# Altium PCB Kanaloa_v2.0.0_Motor.PcbDoc (part 2 of 3)
Units mil, origin at the board's own origin, x right, y up, seen from the top; angles counter-clockwise.
Board outline 5000 x 6000 mil, 4 copper layers (Top Layer, +24V, GND, Bottom Layer), stack 62 mil thick; 213 components, 187 nets, 1008 pads, 744 vias.
Unrouted connection lines stored in the file: 2.
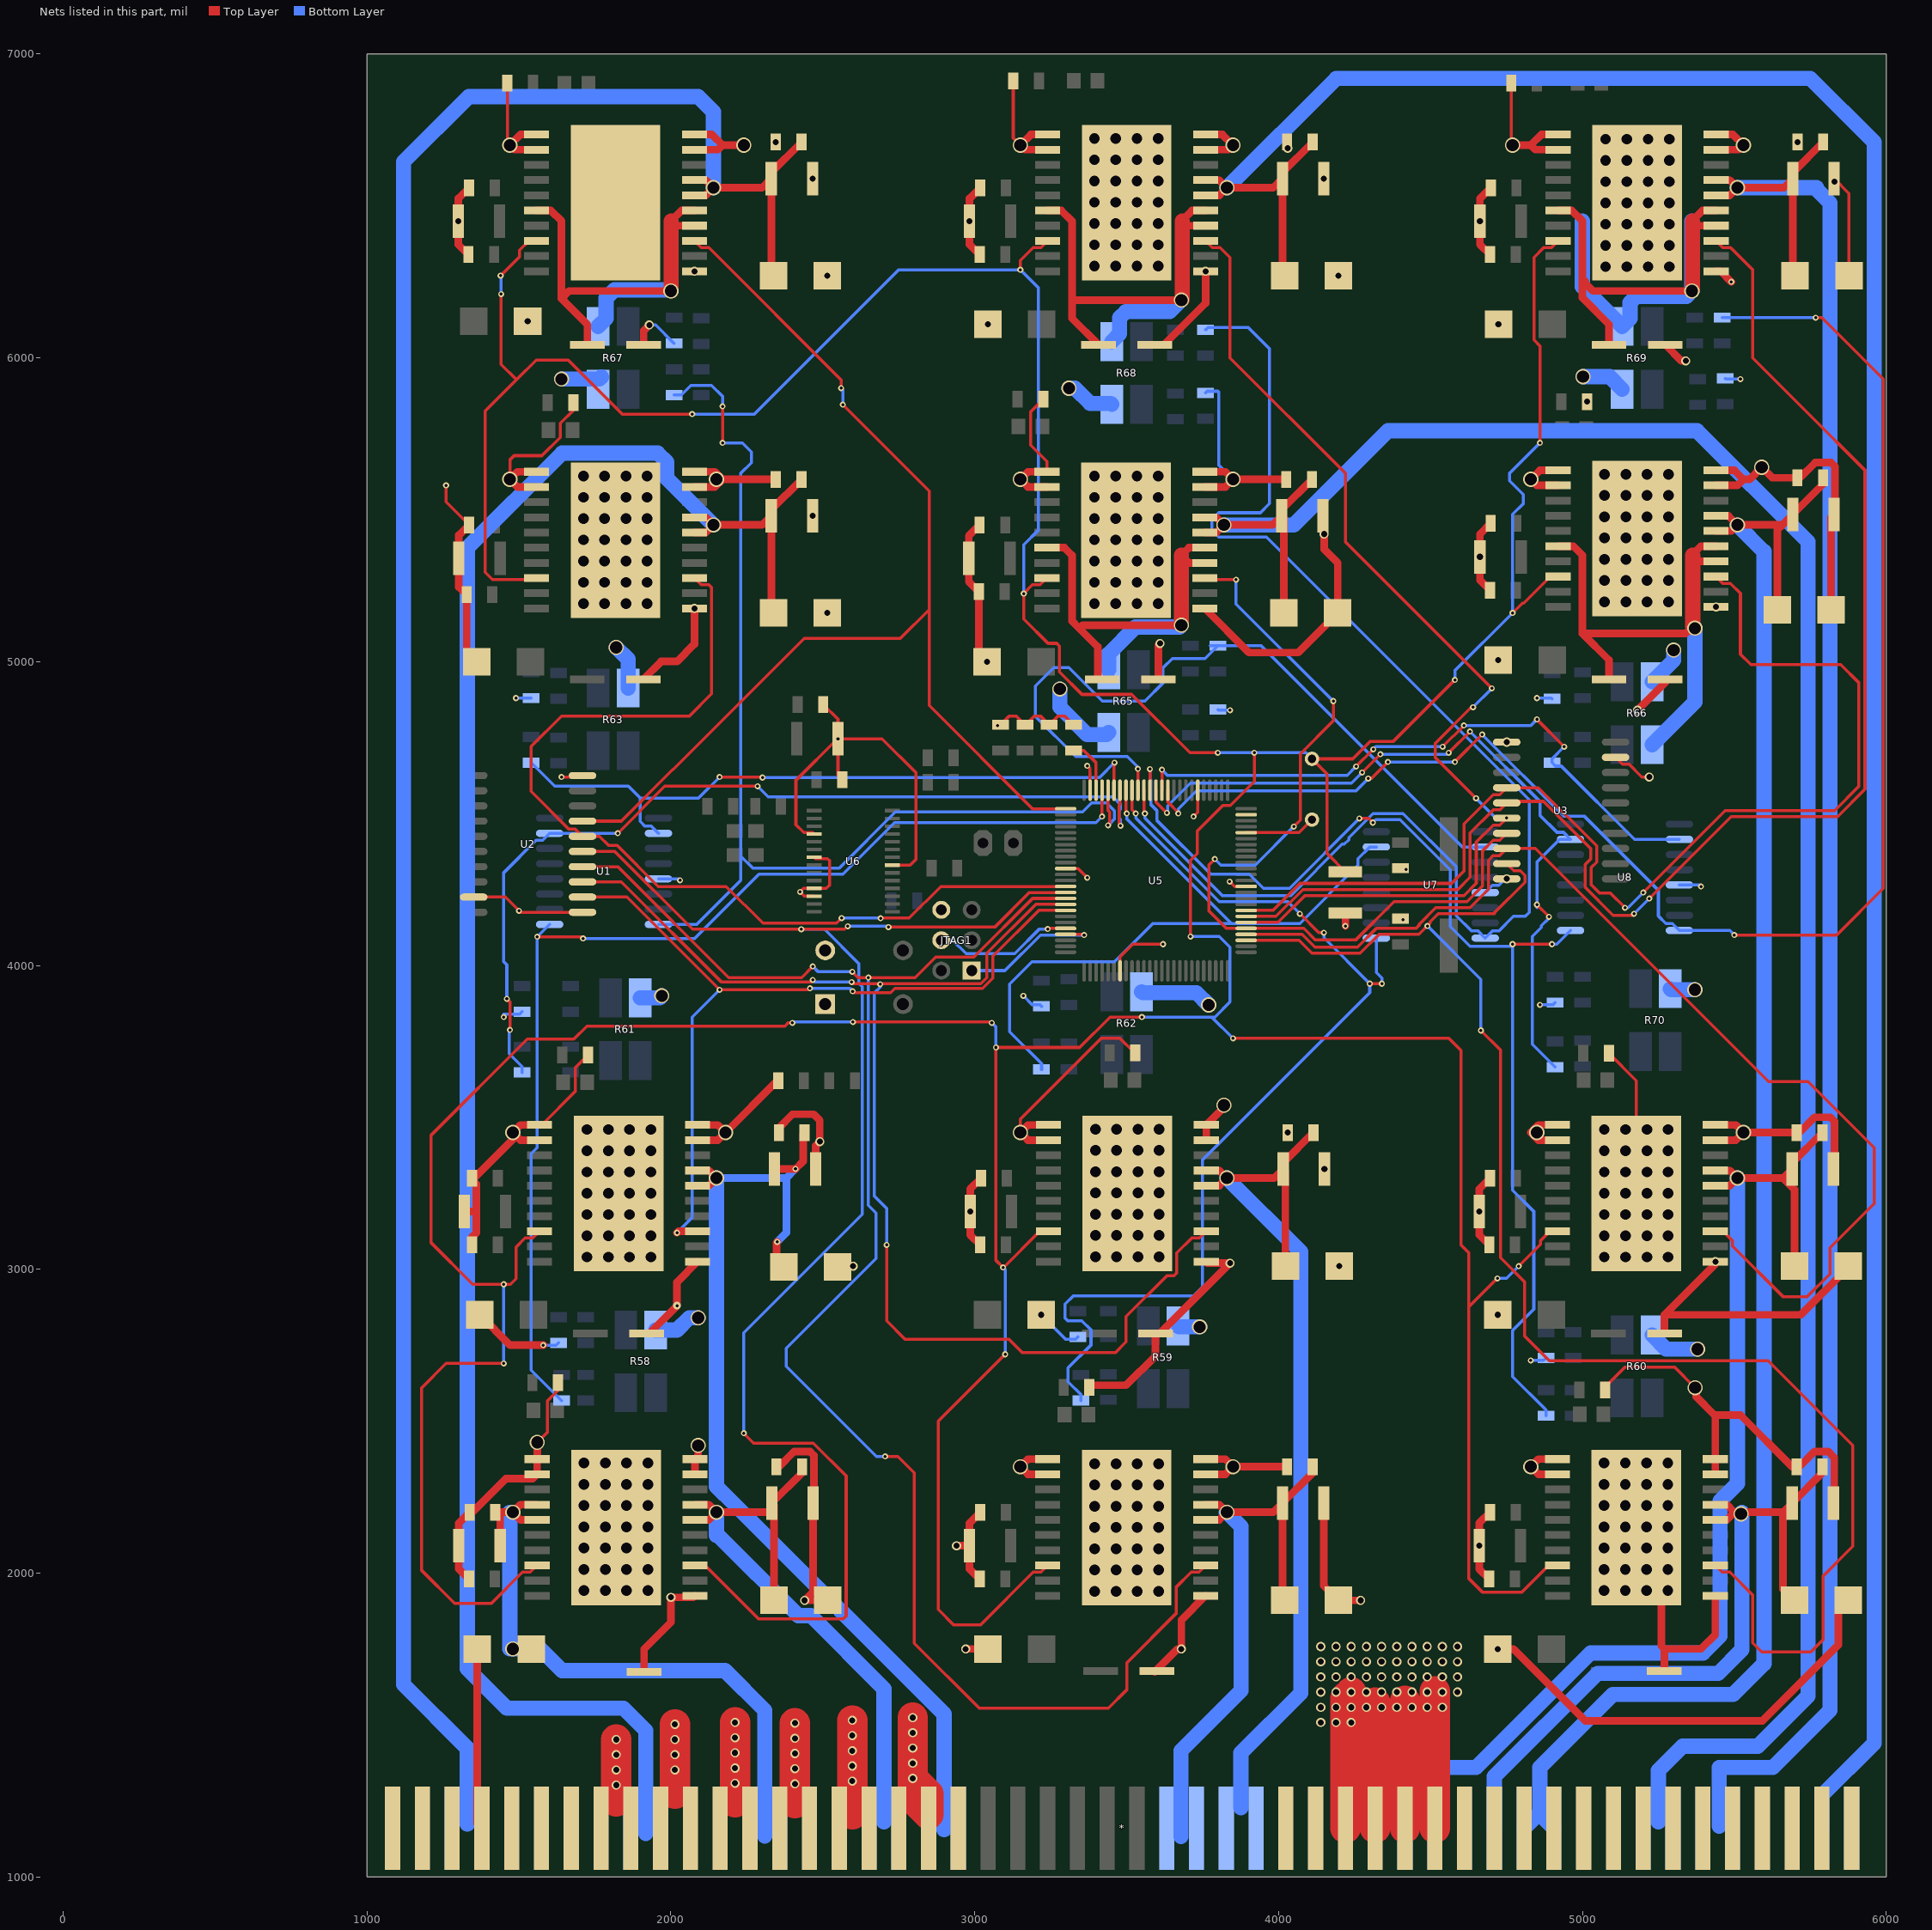
[diagram p4: the nets of this part, all layers, seen from the top]

## Via types
v1: diameter 50, hole 35, Top Layer to Bottom Layer, 336 vias
v2: diameter 20, hole 10, Top Layer to Bottom Layer, 183 vias
v3: diameter 30, hole 20, Top Layer to Bottom Layer, 137 vias
v4: diameter 50, hole 40, Top Layer to Bottom Layer, 87 vias
v5: diameter 25, hole 10, Top Layer to Bottom Layer, 1 vias

## Nets (pads, with @x,y where several pads share a name; then routed paths per layer and width w, separated by ;. In a path a pad name is that pad's centre, name@x,y a point inside that pad or via, vN(x,y) a via of type N, cw(c..) or ccw(c..) an arc to the next point about the centre after c; other vN are vias at no path point) (continued)
+24V_7: "C10_Motor 7.P" pad.4@3757.32,5325 pad.5@3757.32,5375 pad.16@3237.64,5375 R65.3 | length 1620.7
  Top Layer w25: pad.16@3237.64,5375 3295,5375 3320,5350 3320,5134 3344.52,5109.48 ; 3404.96,4942 3405,4942.04 3405,5049 3344.52,5109.48 ; v4(3680,5120) 3355.04,5120 3344.52,5109.48 ; pad.4@3757.32,5325 3705,5325 3680.12,5349.88 3680,5350 3705,5375 pad.5@3757.32,5375
  Top Layer w50: v4(3680,5120) 3680.12,5120.12 3680.12,5349.88 3680.12,5350
  Bottom Layer w25: 3610,5113.78 3616.22,5120
  Bottom Layer w50: R65.3@3440.79,4973.35 3440.79,5025.8 3528.77,5113.78 3610,5113.78 3673.78,5113.78 v4(3680,5120)
+24V_8: "C10_Motor 8.P" pad.4@5439.69,5330 pad.5@5439.69,5380 pad.16@4920,5380 R66.3 | length 1774.9
  Top Layer w25: pad.16@4920,5380 4970,5380 5000,5350 5000,5092.32 ; 5087.32,4942 5087.32,5005 5000,5092.32 ; v4@5363.35,5116.65 5339.02,5092.32 5000,5092.32 ; pad.4@5439.69,5330 5380,5330 5363.35,5346.65 5360,5350 5390,5380 pad.5@5439.69,5380
  Top Layer w50: 5362.48,5350 5363.35,5349.13 5363.35,5346.65 5363.35,5116.65 v4(5370,5110)
  Bottom Layer w50: R66.3@5229.21,4726.65 5370,4867.44 v4(5370,5110)
+24V_9: "C10_Motor 9.P" pad.4@2077.52,6435 pad.5@2077.52,6485 pad.16@1557.83,6485 R67.3 | length 1645.3
  Top Layer w25: pad.16@1557.83,6485 1605,6485 1640,6450 1640,6195.16 ; 1725.16,6043 1725.16,6110 1640,6195.16 ; v4(2000,6220) 1664.84,6220 1640,6195.16 ; pad.4@2077.52,6435 2015,6435 2000.32,6449.69 2000,6450 2035,6485 pad.5@2077.52,6485
  Top Layer w50: v4(2000,6220) 2000.32,6220.31 2000.32,6449.69 2000.32,6450
  Bottom Layer w50: R67.3@1760.79,6103.35 1786.81,6129.37 1786.81,6196.81 1813.78,6223.78 1996.22,6223.78 v4(2000,6220)
+24V_10: "C10_Motor 10.P" pad.4@3759.84,6435 pad.5@3759.84,6485 pad.16@3240.16,6485 R68.3 | length 1648.1
  Top Layer w25: pad.16@3240.16,6485 3285,6485 3320,6450 3320,6130.48 3407.48,6043 ; 3327.48,6190 v4(3680,6190) ; pad.4@3759.84,6435 3695,6435 3682.64,6447.36 3680,6450 3715,6485 pad.5@3759.84,6485
  Top Layer w50: v4(3680,6190) 3682.64,6192.64 3682.64,6447.36 3682.64,6450
  Bottom Layer w50: R68.3@3450.79,6053.35 3476.81,6079.37 3476.81,6131.82 3497.31,6152.32 3642.32,6152.32 v4(3680,6190)
+24V_11: "C10_Motor 11.P" pad.4@5439.84,6435 pad.5@5439.84,6485 pad.16@4920.16,6485 R69.3 | length 2267.9
  Top Layer w25: pad.16@4920.16,6485 4965,6485 5000,6450 5000,6260 ; 5087.48,6043 5087.48,6110 5000,6197.48 5000,6260 ; v4(5360,6220) 5034.64,6220 5009.86,6244.77 5009.86,6250.14 5000,6260 ; pad.4@5439.84,6435 5375,6435 5362.64,6447.36 5360,6450 5395,6485 pad.5@5439.84,6485
  Top Layer w50: v4(5360,6220) 5362.64,6222.64 5362.64,6447.36 5362.64,6450
  Bottom Layer w50: 5000,6450 5000,6234.13 R69.3@5130.79,6103.35 5156.81,6129.37 5156.81,6181.82 5177.31,6202.32 5342.32,6202.32 v4(5360,6220) 5360,6450
+24VPRE: *.30 *.31 *.32 *.33 *.34 *.35 *.36 *.37 *.38 *.39 *.40 *.41 *.42 *.43 *.44 *.45 *.46 *.47 *.48 *.49 R58.1 R59.1 R60.1 R61.1 R62.1 R63.1 R65.1 R66.1 R67.1 R68.1 R69.1 R70.1 | length 3514.4
  Top Layer w100: *.32@4220,1160 4220,1589 v3(4239,1608) ; *.33@4318,1160 4318,1574 ; *.34@4416,1160 4416,1579 ; *.35@4514,1160 4514,1611
  Bottom Layer w50: v4(1640,5930) 1764.13,5930 R67.1@1770.79,5936.65 ; v4(1820,5047) 1859.21,5007.79 R63.1@1859.21,4913.35 ; R61.1@1899.21,3893.35 1963.35,3893.35 v4(1970,3900) ; R58.1@1950,2800 2020,2800 2060,2840 v4(2090,2840) ; v4(3280,4910) 3280,4850 3370,4760 3434.13,4760 R65.1@3440.79,4766.65 ; v4(3310,5900) 3330,5900 3380,5850 3447.44,5850 R68.1@3450.79,5846.65 ; R62.1@3549.21,3913.35 3552.56,3910 3730,3910 v4(3770,3870) ; R59.1@3672.56,2810 v4(3740,2810) ; v4(5002,5938) 5089.44,5938 R69.1@5130.79,5896.65 ; R60.1@5229.21,2783.35 5275.56,2737 v4(5379,2737) ; R66.1@5229.21,4933.35 5300,5004.13 v4(5300,5038) ; R70.1@5289.21,3923.35 5292.56,3920 v4(5370,3920)
  other v3: 4139,1508 4189,1508 4239,1508 4139,1558 4189,1558 4239,1558 4289,1558 4339,1558 4389,1558 4439,1558 4489,1558 4539,1558 4139,1608 4189,1608 4289,1608 4339,1608 4389,1608 4439,1608 4489,1608 4539,1608 4589,1608 4139,1658 4189,1658 4239,1658 4289,1658 4339,1658 4389,1658 4439,1658 4489,1658 4539,1658 4589,1658 4139,1708 4189,1708 4239,1708 4289,1708 4339,1708 4389,1708 4439,1708 4489,1708 4539,1708 4589,1708 4139,1758 4189,1758 4239,1758 4289,1758 4339,1758 4389,1758 4439,1758 4489,1758 4539,1758 4589,1758
AREF: C4.1@3325,4707.68 U5.98 | length 195.9
  Top Layer w10: C4.1@3310.5,4707.68 C4.1@3325,4707.68 3358.74,4707.68 3399.37,4667.05 U5.98@3399.37,4576.81
"CONTROLLER KILL": U5.71 W2.1 | length 234.3
  Top Layer w10: U5.71@3893.46,4437.05 4067.05,4437.05 W2.1@4110,4480
CS0: R13.2 U1.1 U5.97 | length 3748.1
  Top Layer w10: v2(1560,4094.13) 1705.87,4094.13 v2(1711.05,4088.95) ; v2(3419.06,4490) U5.97@3419.06,4576.81
  Bottom Layer w10: U1.1@1600.87,4135 v2(1560,4094.13) 1560,3400 1540,3380 1540,2667.68 R13.2@1640,2567.68 ; v2(1711.05,4088.95) 2078.95,4088.95 2290,4300 2566,4300 2736,4470 3399.06,4470 v2(3419.06,4490)
CS1: R17.2 U5.92 U7.1 | length 3430.7
  Top Layer w10: U5.92@3517.48,4576.81 3517.48,4512.52 v2(3530,4500) ; v2(4070,4170) 4132,4108 v2(4149,4108) ; v2(4300,3940) v2(4340,3940)
  Bottom Layer w10: R17.2@3350,2567.68 3350,2586.82 3307.44,2629.38 3307.44,2675.27 3382.56,2750.39 3382.56,2800.62 3352.59,2830.59 3306.23,2830.59 3297.44,2839.38 3297.44,2885.27 3324.5,2912.32 3720,2912.32 3750,2942.32 3750,3360 4300,3910 v2(4300,3940) 4149,4091 v2(4149,4108) ; v2(3530,4500) 3530,4485 3805,4210 4030,4210 v2(4070,4170) ; U7.1@4321.73,4090 4321.73,3976.55 4340,3958.28 v2(4340,3940)
CS2: R21.2 U5.89 U8.1 | length 3766.8
  Top Layer w10: U5.89@3576.54,4576.81 v2(3576.54,4646.54) ; v2(4266.03,4483.97) 4296.03,4483.97 v2(4310,4470) ; v2(4770,4070) v2(4900,4070)
  Bottom Layer w10: v2(3576.54,4646.54) 3576.54,4612.61 3579.14,4610 3579.14,4530 3599,4510.14 3599,4478 3777,4300 3903.97,4300 3950,4253.97 4036.03,4253.97 v2(4266.03,4483.97) ; v2(4310,4470) 4320,4480 4400,4480 4565,4315 4565,4128.19 4630,4063.19 4763.19,4063.19 v2(4770,4070) 4770,3260 4840,3190 4840,2868.28 4770,2798.28 4770,2646.82 4880,2536.82 R21.2@4880,2517.68 ; v2(4900,4070) 4915.87,4070 U8.1@4960.87,4115
CS3: R25.2 U1.7 U5.94 | length 3051.7
  Top Layer w10: v2(1460,3890) 1470,3880 v2(1470,3787.56) ; v2(1825,4435) 1980,4590 v2(2285,4590) ; 3477.8,4530 3475,4527.2 3475,4465 v2(3480,4460) ; 3478.11,4530 U5.94@3478.11,4576.81
  Bottom Layer w10: v2(1460,3890) 1460,4001.72 1450,4011.72 1450,4305.51 1556.3,4411.81 1577.68,4411.81 U1.7@1600.87,4435 v2(1825,4435) ; v2(1470,3787.56) 1467.44,3785 1467.44,3709.38 1510,3666.82 R25.2@1510,3647.68 ; v2(2285,4590) 2320,4555 3455,4555 3480,4530 3480,4515.36 3475,4510.36 3475,4484.64 3480,4479.64 v2(3480,4460)
CS4: R29.2 U5.93 U7.7 | length 2313
  Top Layer w10: U5.93@3497.8,4576.81 3497.8,4502.2 v2(3500,4500)
  Bottom Layer w10: R29.2@3220,3657.68 3220,3676.82 3115,3781.82 3115,3938.79 3188.53,4012.32 3460,4012.32 3585.96,4138.28 3844.72,4138.28 ; v2(3500,4500) 3500,4483 3844.72,4138.28 ; U7.7@4321.73,4390 4300.35,4390 4261.46,4351.11 4261.46,4329.74 4070,4138.28 3844.72,4138.28
CS5: R33.2 U5.88 U8.7 | length 2611.8
  Top Layer w10: U5.88@3596.22,4576.81 3596.22,4537.4 3631.2,4502.43 v2(3632.43,4502.43) ; v2(4275,4635) v2(4335,4695) ; v2(4560,4700) v2(4630,4770) ; v2(4850,4200) v2(4890,4160)
  Bottom Layer w10: v2(3632.43,4502.43) 3635,4505 3635,4525 3710,4600 4240,4600 v2(4275,4635) ; v2(4335,4695) 4555,4695 v2(4560,4700) ; v2(4630,4770) 4860,4540 4860,4494.49 4916.3,4438.19 4937.68,4438.19 U8.7@4960.87,4415 4925,4415 4850,4340 v2(4850,4200) 4850,4190 ; v2(4890,4160) 4890,4155.36 4865,4130.36 4865,4125 4835,4095 4835,3740.35 R33.2@4910,3665.35
CS6: R37.2 U1.10 U5.95 | length 2263
  Top Layer w10: v2(2160,4620) 2300,4620 v2(2301.57,4618.43) ; U5.95@3458.43,4576.81 3458.43,4666.1 v2(3460,4667.68)
  Bottom Layer w10: R37.2@1540,4667.68 1617.68,4590 1860,4590 1898.86,4551.14 ; U1.10@1959.13,4435 1935.94,4458.19 1914.56,4458.19 1898.86,4473.89 1898.86,4551.14 ; v2(2160,4620) 2091.14,4551.14 1898.86,4551.14 ; v2(2301.57,4618.43) 3410.75,4618.43 v2(3460,4667.68)
CS7: R41.2 U5.91 U7.10 | length 2534.8
  Top Layer w10: U5.91@3537.17,4576.81 v2(3537.17,4647.17)
  Bottom Layer w10: v2@3540,4650 3502.32,4687.68 3332.32,4687.68 3200,4820 3200,4920 3260,4980 3310,4980 3420,4870 3560,4870 3620,4930 3620,4980 3650,5010 3757.68,5010 R41.2@3800,5052.32 ; R41.2@3775.5,5052.32 R41.2@3800,5052.32 ; U7.10@4680,4390 4604.85,4390 3942.53,5052.32 R41.2@3800,5052.32
CS8: R45.2 U5.87 U8.10 | length 2105.1
  Top Layer w10: U5.87@3615.91,4576.81 v2(3615.91,4644.09) ; v2(4255,4655) v2(4311.57,4711.57) ; v2(4540,4720) v2(4610,4790) ; v2(4850,4810) v2(4940,4720)
  Bottom Layer w10: v2(3615.91,4644.09) 3634.09,4625.91 4225.91,4625.91 v2(4255,4655) ; v2(4311.57,4711.57) 4320,4720 v2(4540,4720) ; v2(4610,4790) 4830,4790 v2(4850,4810) ; v2(4940,4720) 4900,4680 R45.2@4900,4667.68 4911.73,4655.94 4930.62,4655.94 5171.57,4415 U8.10@5319.13,4415
CS9: R49.2 U1.16 U5.96 | length 3727.4
  Top Layer w10: v2(2170,5720) v2(2170,5840) ; 3438.74,4530 U5.96@3438.74,4576.81 ; v2(3439.06,4460.94) 3444.06,4465.94 3444.06,4505.36 3439.06,4510.36 3439.06,4530
  Bottom Layer w10: U1.16@1959.13,4135 2085,4135 2230,4280 2230,4360 ; R49.2@2010,5877.68 2034.5,5877.68 2066.23,5909.41 2133.77,5909.41 2170,5873.18 v2(2170,5840) ; v2(2170,5720) 2235.36,5720 2265,5690.36 2265,5655 2230,5620 2230,4360 ; v2(3439.06,4460.94) 3460,4481.89 3460,4508.74 3433.74,4535 3385,4535 3355,4505 2739,4505 2554,4320 2270,4320 2230,4360
CS10: R53.2 U5.90 U7.16 | length 4659.7
  Top Layer w10: U5.90@3556.85,4576.81 3556.85,4503.15 v2(3560,4500)
  Bottom Layer w10: v2(3560,4500) 3560,4485 3815,4230 4040.35,4230 4209.32,4398.97 4216.39,4398.97 4231.03,4413.61 4231.03,4420.68 4310.35,4500 4410,4500 4585,4325 4585,4163.62 4635.43,4113.19 4656.81,4113.19 U7.16@4680,4090 4703.19,4113.19 4724.57,4113.19 4773.2,4161.82 4811.82,4161.82 4825,4175 4825,4545 3960,5410 3803.43,5410 3780,5433.43 3780,5466.57 3803.43,5490 3940,5490 3970,5520 3970,6030 3900,6100 3767.68,6100 R53.2@3760,6092.32
CS11: R57.2 U5.86 U8.16 | length 5207.6
  Top Layer w10: U5.86@3635.59,4576.81 3635.59,4537.4 3670,4502.99 v2(3670,4500) ; v2(4295,4615) 4305,4615 v2(4360,4670) ; v2(4580,4670) v2(4670,4760) ; v2(5500,4100) 5836.57,4100 5990,4253.43 5990,5930 5787.68,6132.32 v2(5767.68,6132.32)
  Bottom Layer w10: v2(3670,4500) 3670,4515 3730,4575 4255,4575 v2(4295,4615) ; v2(4360,4670) v2(4580,4670) ; v2(4670,4760) 4938.19,4491.81 5005.44,4491.81 5250,4247.25 5250,4162.75 5274.56,4138.19 5295.94,4138.19 U8.16@5319.13,4115 5485,4115 v2(5500,4100) ; R57.2@5460,6132.32 v2(5767.68,6132.32) v2@5770,6130
DIR0: pad.3@2079.21,2025 U2.5 U5.15 | length 5126.9
  Top Layer w10: U2.5@1709.13,4375 1815,4375 2071,4119 v2(2429,4119) 2572,4119 v2(2582,4129) ; pad.3@2079.21,2025 2112.61,2025 2287.88,1849.72 2568.02,1849.72 2576.81,1858.51 2576.81,2319.88 2469.14,2427.56 2272.44,2427.56 v2(2240,2460) ; v2(2716,4126) 3066,4126 3180.2,4240.2 U5.15@3298.98,4240.2
  Bottom Layer w10: v2(2240,2460) 2240,2790.36 2630,3180.36 2630,3930 2618,3942 2618,4006 2505,4119 v2(2429,4119) ; v2(2582,4129) 2713,4129 v2(2716,4126)
DIR1: pad.3@3759.84,2025 U2.4 U5.16 | length 5764.1
  Top Layer w10: U2.4@1709.13,4325 1825,4325 2190,3960 2430,3960 v2(2467,3997) ; v2(2597,3979) 2616,3960 v2(2650,3960) 2803.95,3960 2871.56,4027.61 2997.61,4027.61 3190.51,4220.51 U5.16@3298.98,4220.51 ; v2(2705,2384) 2747,2384 2801,2330 2801,1769 3015,1555 3440,1555 3500,1615 3500,1704 3662.64,1866.64 3662.64,1887.88 3662.64,1953.14 3712.29,2002.8 3737.64,2002.8 pad.3@3759.84,2025
  Bottom Layer w10: v2(2467,3997) 2485,3979 v2(2597,3979) ; v2(2650,3960) 2650,3210 2675,3185 2675,3035 2380,2740 2380,2680 2676,2384 v2(2705,2384)
DIR2: pad.3@5437.32,2025 U3.9 U5.53 | length 5108.2
  Top Layer w10: U5.53@3893.46,4082.72 4067.28,4082.72 4110,4040 4268.13,4040 4331.05,4102.91 4462.06,4102.91 4499.14,4140 4499.14,4143.47 4525.68,4170 4710,4170 4710,4172.75 4811.14,4273.89 4811.14,4296.11 4795.44,4311.81 4774.06,4311.81 U3.9@4750.87,4335 ; v2(4665.86,3785.86) 4730,3721.72 4730,3038.28 4810,2958.28 4810,2780 4891,2699 5611,2699 5890,2420 5890,2087.68 5792.32,1990 5792.32,1780.61 5751.72,1740 5590,1740 5560,1770 5560,1927.67 5484.87,2002.8 5459.53,2002.8 pad.3@5437.32,2025
  Bottom Layer w10: v2(4490,4130) 4665.86,3954.14 v2(4665.86,3785.86)
DIR3: pad.3@2087.52,3125 U2.2 U5.18 | length 2806.1
  Top Layer w10: U2.2@1709.13,4225 1855,4225 v2(2160,3920) 2453,3920 v2(2458,3925) ; v2(2598,3915) 2603,3910 2723,3910 2737,3924 3025.33,3924 3060,3958.67 3060,4030 3211.14,4181.14 U5.18@3298.98,4181.14
  Top Layer w25: v2(2020,3120) 2025,3125 pad.3@2087.52,3125
  Bottom Layer w10: v2(2020,3120) 2070,3170 2070,3830 v2(2160,3920) ; v2(2458,3925) 2588,3925 v2(2598,3915)
DIR4: pad.3@3762.17,3125 U2.3 U5.17 | length 4370.2
  Top Layer w10: U2.3@1709.13,4275 1836.98,4275 2166.98,3945 2460,3945 v2(2467,3952) ; v2(2595,3945) 2600,3940 3020.12,3940 3040,3959.88 3040,4040 3200.83,4200.83 U5.17@3298.98,4200.83 ; v2(2710,3080) 2710,2830 2770,2770 3112,2770 3157,2725 3462,2725 3498,2761 3498,2844.25 3632.84,2979.09 3656.17,2979.09 3664.96,2987.88 3664.96,3053.14 3714.61,3102.8 3739.96,3102.8 pad.3@3762.17,3125
  Bottom Layer w10: v2(2467,3952) 2474,3945 v2(2595,3945) ; v2(2689,3938) 2689,3929 2670,3910 2670,3240 2710,3200 v2(2710,3080)
DIR5: pad.3@5437.52,3125 U3.8 U5.54 | length 3702.8
  Top Layer w10: U5.54@3893.46,4102.4 4077.6,4102.4 4120,4060 4259.85,4060 4322.76,4122.91 4453.77,4122.91 4462.56,4131.7 4462.56,4135.17 4517.39,4190 4630,4190 4690.59,4250.59 4690.59,4346.11 4706.3,4361.81 4727.68,4361.81 U3.8@4750.87,4385 ; U3.8@4715.86,4385 U3.8@4750.87,4385 ; pad.3@5437.52,3125 5462.87,3125 5493.86,3094.01 5493.86,3076.14 5660,2910 5740,2910 5814.57,2984.57 5814.57,3070.28 5960,3215.71 5960,3400 5742.56,3617.44 5612.56,3617.44 4845,4385 U3.8@4750.87,4385
DIR6: pad.3@2077.56,5275 U2.6 U5.14 | length 3222.4
  Top Layer w10: pad.3@2077.56,5275 2099.76,5252.8 2125.11,5252.8 2133.9,5244.01 2133.9,4893.9 2060.86,4820.86 1640,4820.86 1540,4720.86 1540,4572.75 1664.56,4448.19 1685.94,4448.19 U2.6@1709.13,4425 1765,4425 1795,4395 1823.28,4395 1958.4,4259.88 2182.12,4259.88 2303,4139 2545.17,4139 v2(2562,4155.83) ; v2(2690,4155) 2690.83,4155.83 2784.12,4155.83 2888.17,4259.88 U5.14@3298.98,4259.88
  Bottom Layer w10: v2(2562,4155.83) 2689.17,4155.83 v2(2690,4155)
DIR7: pad.3@3757.32,5275 U3.7 U5.55 | length 2895.8
  Top Layer w10: pad.3@3725,5275 pad.3@3757.32,5275 3762.32,5270 v2(3860,5270) ; v2(3790,4350) 3770,4330 3770,4180 3827.91,4122.09 ; 3854.06,4122.09 3827.91,4122.09 ; v2(4050,4457.05) 4071.38,4478.43 4071.38,4696 4180,4804.62 v2(4180,4870) ; U3.7@4750.87,4435 4727.68,4411.81 4706.3,4411.81 4670.59,4376.11 4670.59,4260.59 4620,4210 4380,4210 4253.53,4083.53 4121.11,4083.53 4082.56,4122.09 U5.55@3893.46,4122.09 3827.91,4122.09
  Bottom Layer w10: v2(3790,4350) 3810,4330 3922.95,4330 v2(4050,4457.05) ; v2(3860,5270) 3860,5190 v2(4180,4870)
DIR8: pad.3@5439.69,5280 U3.4 U5.58 | length 3810.3
  Top Layer w10: U5.58@3893.46,4181.14 3981.14,4181.14 4070,4270 4569.68,4270 4610.59,4310.91 4610.59,4466.11 4706.3,4561.81 4727.68,4561.81 U3.4@4750.87,4585 4855,4585 5046.72,4393.28 5046.72,4340.1 5028.86,4322.25 5028.86,4265.61 5056.28,4238.19 5091.81,4238.19 v2(5140,4190) ; v2(5200,4240) 5470,4510 5830,4510 5910,4590 5910,4930 5850,4990 5554.34,4990 5520,5024.34 5520,5225.03 5487.24,5257.8 5461.89,5257.8 pad.3@5439.69,5280 pad.3@5473.08,5280
  Bottom Layer w10: v2(5140,4190) 5150,4190 v2(5200,4240)
DIR9: pad.3@2077.52,6385 U2.7 U5.1 | length 3883.1
  Top Layer w10: U2.7@1709.13,4475 1836.72,4475 2006.72,4645 2008,4645 2439,5076 2755,5076 2850,5171 ; pad.3@2077.52,6385 2099.72,6362.8 2125.07,6362.8 2560,5927.87 v2(2560,5900) ; v2(2565.86,5845.86) 2850,5561.72 2850,5171 ; U5.1@3298.98,4515.79 3189.85,4515.79 2850,4855.64 2850,5171
  Bottom Layer w10: v2(2560,5900) 2565.86,5894.14 v2(2565.86,5845.86)
DIR10: pad.3@3759.84,6385 U3.6 U5.56 | length 3583.3
  Top Layer w10: pad.3@3759.84,6385 3782.05,6362.8 3807.39,6362.8 3840,6330.19 3840,6000 4220,5620 4220,5393.82 v2(4701.91,4911.91) ; U5.56@3893.46,4141.77 3998.23,4141.77 4086.46,4230 4610,4230 4650.59,4270.59 4650.59,4406.11 4706.3,4461.81 4727.68,4461.81 v2(4750.87,4485) ; v2(4640,4850) 4634.64,4850 4515,4730.36 4515,4685 v2(4650,4550)
  Bottom Layer w10: v2(4640,4850) v2(4701.91,4911.91) ; v2(4650,4550) 4715,4485 v2(4750.87,4485)
DIR11: pad.3@5439.84,6385 U3.5 U5.57 | length 4728.7
  Top Layer w10: U5.57@3893.46,4161.46 3991.46,4161.46 4080,4250 4590,4250 4630.59,4290.59 4630.59,4436.11 4706.3,4511.81 4727.68,4511.81 U3.5@4750.87,4535 4755.87,4540 4871.72,4540 5026.72,4385 5026.72,4350 5008.86,4332.14 5008.86,4257.33 5101.18,4165 5165,4165 v2(5170,4170) ; v2(5220,4220) 5490,4490 5840,4490 5930,4580 5930,5630 5737.32,5822.68 5560,6000 5560,6290.19 5487.39,6362.8 5462.05,6362.8 pad.3@5439.84,6385
  Bottom Layer w10: v2(5170,4170) v2(5220,4220)
DIR12: U5.74
GND: "C7_Motor 1.1" "C7_Motor 2.1" "C7_Motor 3.1" "C7_Motor 4.1" "C7_Motor 5.1" "C7_Motor 6.1" "C7_Motor 7.1" "C7_Motor 8.1" "C7_Motor 9.1" "C7_Motor 10.1" "C7_Motor 11.1" "C9_Motor 1.1" "C9_Motor 2.1" "C9_Motor 3.1" "C9_Motor 4.1" "C9_Motor 5.1" "C9_Motor 6.1" "C9_Motor 7.1" "C9_Motor 8.1" "C9_Motor 9.1" "C9_Motor 10.1" "C9_Motor 11.1" "C10_Motor 2.N" "C10_Motor 3.N" "C10_Motor 4.N" "C10_Motor 5.N" "C10_Motor 6.N" "C10_Motor 7.N" "C10_Motor 8.N" "C10_Motor 9.N" "C10_Motor 10.N" "C10_Motor 11.N" "C11_Motor 1.1" "C11_Motor 2.1" "C11_Motor 3.1" "C11_Motor 4.1" "C11_Motor 5.1" "C11_Motor 6.1" "C11_Motor 7.1" "C11_Motor 8.1" "C11_Motor 9.1" "C11_Motor 10.1" "C11_Motor 11.1" "C11_Motor 12.2" "C13_Motor 1.1" "C13_Motor 2.1" "C13_Motor 3.1" "C13_Motor 4.1" "C13_Motor 5.1" "C13_Motor 6.1" "C13_Motor 7.1" "C13_Motor 8.1" "C13_Motor 9.1" "C13_Motor 10.1" "C13_Motor 11.1" "C14_Motor 1.1" "C14_Motor 2.1" "C14_Motor 3.1" "C14_Motor 4.1" "C14_Motor 5.1" "C14_Motor 6.1" "C14_Motor 7.1" "C14_Motor 8.1" "C14_Motor 9.1" "C14_Motor 10.1" "C14_Motor 11.1" "D1_Motor 1.1" "D1_Motor 2.1" "D1_Motor 3.1" "D1_Motor 4.1" "D1_Motor 5.1" "D1_Motor 6.1" "D1_Motor 7.1" "D1_Motor 8.1" "D1_Motor 9.1" "D1_Motor 10.1" "D1_Motor 11.1" "D2_Motor 1.1" "D2_Motor 2.1" "D2_Motor 3.1" "D2_Motor 4.1" "D2_Motor 5.1" "D2_Motor 6.1" "D2_Motor 7.1" "D2_Motor 8.1" "D2_Motor 9.1" "D2_Motor 10.1" "D2_Motor 11.1" "R3_Motor 1.2" "R3_Motor 2.2" "R3_Motor 3.2" "R3_Motor 4.2" "R3_Motor 5.2" "R3_Motor 6.2" "R3_Motor 7.2" "R3_Motor 8.2" "R3_Motor 9.2" "R3_Motor 10.2" "R3_Motor 11.2" *.0 *.1 *.2 *.3 *.4 *.5 *.6 *.7 *.8 *.9 *.10 *.11 *.12 *.13 *.14 *.15 *.16 *.17 *.18 *.19 ?.1 ?.3 C1.2 C2.2 C3.2 C4.2@3325,4792.32 C6.1 C7.2 C7_0.1 C8.1 C9.2 C9_0.1 C10.N C10_0.N C11_0.1 C13_0.1 C14_0.1 D1.1 D2.1 JTAG1.6 pad.1 pad.9 pad.10 pad.11 pad.12 pad.21 R1.1 R3.2 R9.2 R12.2 R16.2 R20.2 R24.2 R28.2 R32.2 R36.2 R40.2 R44.2 R48.2 R52.2 R56.2 U1.13 U2.1 U2.10 U2.19 U3.1 U3.10 U3.19 U5.11 U5.32 U5.62 U5.81 U5.99 U6.7 U6.18 U6.21 U6.25 U6.26 U7.13 U8.13 | length 31123.7
  Top Layer w10: v2(1260,5580) 1260,5526.02 1336.02,5450 ; U2.19@1350.87,4225 1455,4225 v2(1500,4180) 1505,4175 U2.1@1709.13,4175 ; 1461.68,6905 1461.68,6708.32 v4(1470,6700) ; v4(1470,5600) 1470,5664 1484,5678 1575.72,5678 1636,5738.28 1636,5784.28 1679.04,5827.32 1679.04,5852 ; v4(1560,2430) 1593.1,2463.1 1593.1,2565.73 1628.69,2601.32 R3.2@1628.69,2626 ; pad.11@1567.83,3475 1575,3475 1685,3585 1685,3663 1727,3705 1716.65,3705 ; v2(1640,4620) 1704.13,4620 U2.10@1709.13,4625 ; C13_0.1@2345.2,2350 2347.05,2348.16 C13_0.1@2347.05,2350 ; U6.26@2471.06,4227.92 2439.08,4227.92 v2(2425,4242) 2436.51,4253.51 U6.25@2471.06,4253.51 2511.51,4253.51 2523,4265 2523,4344 2515.81,4351.19 2475.75,4351.19 U6.21@2471.06,4355.87 ; U6.18@2471.06,4432.65 2466.38,4437.33 2437.55,4437.33 2411.46,4463.42 2411.46,4609.28 2548.17,4746 v2(2549.91,4746) ; C9.2@2501.32,4859 2549.91,4810.41 v2(2549.91,4746) ; C7.2@2564.32,4612 2549.91,4626.41 v2(2549.91,4746) ; U6.7@2728.94,4330.28 2787.28,4330.28 2805.94,4348.94 2805.94,4635.06 2695,4746 v2(2549.91,4746) ; C1.2@3085,4792.32 3112.68,4820 3137.32,4820 C2.2@3165,4792.32 3167.32,4792.32 3195,4820 3217.32,4820 C3.2@3245,4792.32 ; 3126.68,6911 3126.68,6723.32 v4(3150,6700) ; v4(3150,3450) 3150,3494 3417,3761 3477,3761 3526,3712 ; 3225.8,5864 3184,5822.2 3184,5713 3237.64,5659.36 pad.11@3237.64,5625 ; C3.2@3247.32,4790 C3.2@3245,4792.32 ; U5.11@3298.98,4318.94 3340,4318.94 v2(3370,4288.94) ; C4.2@3327.32,4792.32 C4.2@3325,4792.32 3297.32,4820 3272.68,4820 C3.2@3245,4792.32 ; v2(3370,4657) 3379.69,4647.31 3379.69,4629.69 ; U5.99@3379.69,4576.81 3379.69,4629.69 ; 3380,4630 3379.69,4629.69 ; U5.32@3478.11,3982.32 3478.11,4028.11 3480,4030 ; 3478.43,4028.11 3520.31,4070 v2(3620,4070) ; 3524,3712 3526,3712 ; 3528.65,3712 3526,3712 ; v2(3720,4490) 3734.02,4504.02 U5.81@3734.02,4576.81 ; v2(3839,4276) 3855.12,4259.88 U5.62@3893.46,4259.88 ; 4765.68,6904 4765.68,6704.32 v4(4770,6700) ; 5074.65,2603 5074.65,2625.65 ; 5074.65,2612.65 5139,2677 5304,2677 v4(5371,2610) v4@5374,2607 ; 5087.32,3711 5177.68,3620.65 pad.21@5177.68,3250 ; U3.19@5109.13,4685 5132.32,4661.81 5153.7,4661.81 5195.51,4620 v3(5220,4620) ; v3@5828.54,6590 5877.17,6541.38 5877.17,6270
  Top Layer w25: 1320,3190 1360,3190 ; 1333.66,6340 1300.39,6373.27 v3(1300.39,6450) 1300.39,6524.41 1335.98,6560 ; C9_0.1@1335.35,1980 1302.09,2013.27 C11_0.1@1302.09,2090 1302.09,2164.41 C14_0.1@1337.68,2200 1346.21,2200 1456.51,2310.3 1544.82,2310.3 pad.12@1559.53,2325 pad.11@1559.53,2375 1560,2375.47 v4(1560,2430) ; 1336.02,5450 1302.09,5416.06 1302.09,5340 1302.09,5245.59 1327.68,5220 1327.68,5033.5 1361.18,5000 ; 1345.35,3080 1345.35,3105.35 1360,3120 1360,3190 ; 1345.98,3300 1345.98,3294.02 ; 1361.14,2860 1371.14,2850 1471.14,2750 v2(1580,2750) ; D2.1@1362.83,1750 1362.83,1175.17 *.3@1378,1160 ; pad.12@1557.87,5575 1495,5575 v4(1470,5600) 1495,5625 pad.11@1557.87,5625 ; pad.12@1557.83,6685 1485,6685 v4(1470,6700) 1505,6735 pad.11@1557.83,6735 ; pad.12@1567.83,3425 1505,3425 v4(1480,3450) ; pad.11@1567.83,3475 1505,3475 v4(1480,3450) ; pad.21@1842.99,2150 pad.21@1892.82,2150 ; 1909.52,4942 1968,5000.48 2020.48,5000.48 2077.56,5057.56 v3(2077.56,5175) ; 1910.2,6043 1910.2,6089.2 v3(1929,6108) ; C10_0.N@1911.52,1675 1911.52,1749.63 2000,1838.11 v3(2000,1920) 2074.21,1920 pad.1@2079.21,1925 ; 1920.2,2788 1928,2788 v5(2020,2880) 2020,2957.48 pad.1@2087.52,3025 ; pad.9@2077.52,6685 2155,6685 2170,6700 ; pad.10@2077.52,6735 2135,6735 2170,6700 ; pad.9@2077.56,5575 2145,5575 v4@2170,5600 ; pad.10@2077.56,5625 2145,5625 v4@2170,5600 ; pad.9@2079.21,2325 pad.10@2079.21,2375 2090,2385.79 v4(2090,2420) v4@2082.5,2420 ; pad.9@2087.52,3425 2155,3425 v4(2180,3450) ; pad.10@2087.52,3475 2155,3475 v4(2180,3450) ; v4(2150,5600) v4@2170,5600 ; v4(2240,6700) 2170,6700 ; 2345.39,5600 v4@2170,5600 ; C13_0.1@2347.05,2350 2355.58,2350 2405.64,2400.06 2457.75,2400.06 2470.93,2386.88 2470.93,2233.01 C7_0.1@2467.91,2230 2467.91,1937.91 v3(2440,1910) D1.1@2516.54,1910 ; R9.2@2353,3620.08 2350.08,3620.08 v4(2180,3450) ; 2355.35,3450 2355.35,3465.35 2400,3510 2470,3510 2490,3490 v3(2490,3420) 2476.22,3406.22 2476.22,3330 ; 2524.84,3010 v3(2600,3010) ; v3(2940,2090) 2982.72,2090 ; v3(2970,1750) 3043.46,1750 ; 3015.79,5450 2980.2,5414.41 2980.2,5340 2980.2,5263.27 3013.46,5230 3013.46,5027.48 v3(3040.94,5000) ; 3015.98,1980 2982.72,2013.27 2982.72,2090 ; 3015.98,6340 2982.72,6373.27 v3(2982.72,6450) 2982.72,6524.41 3018.31,6560 ; 3018.31,2200 2982.72,2164.41 2982.72,2090 ; 3018.31,3080 2985.04,3113.27 v3(2985.04,3190) 2985.04,3264.41 3020.63,3300 ; pad.12@3237.64,5575 3175,5575 v4(3150,5600) 3175,5625 pad.11@3237.64,5625 ; pad.12@3240.16,2325 3175,2325 v4(3150,2350) 3175,2375 pad.11@3240.16,2375 ; pad.12@3240.16,6685 3165,6685 v4(3150,6700) 3185,6735 pad.11@3240.16,6735 ; pad.12@3242.48,3425 3175,3425 v4(3150,3450) 3175,3475 pad.11@3242.48,3475 ; 3377.32,2611 3384.32,2618 3498,2618 3594.84,2714.84 3594.84,2788 3608,2788 v3(3840,3020) pad.1@3764.84,3020 ; C10.N@3592.52,1675 3667.52,1750 v3(3680,1750) 3680,1845.16 pad.1@3759.84,1925 ; 3592.52,6043 3623,6043 3759.84,6179.84 v3(3759.84,6285) ; 3604.52,4942 3604.52,5054.52 v3(3610,5060) ; pad.1@3757.32,5175 3902.32,5030 4064.65,5030 4194.65,5160 4194.65,5325.35 4150,5370 v3(4150,5420) ; pad.9@3757.32,5575 3825,5575 v4(3850,5600) ; pad.10@3757.32,5625 3825,5625 v4(3850,5600) ; pad.9@3759.84,2325 3825,2325 v4(3850,2350) ; pad.10@3759.84,2375 3825,2375 v4(3850,2350) ; pad.9@3759.84,6685 3835,6685 v4(3850,6700) 3815,6735 pad.10@3759.84,6735 ; pad.9@3762.17,3425 pad.10@3762.17,3475 3820,3532.83 v4(3820,3540) ; 4025.16,5600 v4(3850,5600) ; 4027.68,2350 v4(3850,2350) ; 4148.54,2230 4148.54,1958.62 4197.17,1910 v3(4270,1910) ; v2(4220,4130) R1.1@4220,4172.09 ; 4693.46,1980 4660.2,2013.27 v3(4660.2,2090) 4660.2,2164.41 4695.79,2200 ; 4693.66,3080 4660.39,3113.27 v3(4660.39,3190) 4660.39,3264.41 4695.98,3300 ; 4695.83,5235 4662.56,5268.27 v3(4662.56,5345) 4662.56,5419.41 4698.15,5455 ; 4695.98,6340 4662.72,6373.27 v3(4662.72,6450) 4662.72,6524.41 4698.31,6560 ; v3(4720.94,1750) 4772.82,1750 5009.82,1513 5591.89,1513 5841.87,1762.98 5841.87,1877.22 5874.65,1910 ; v4(4770,6700) 4830,6700 ; pad.12@4917.64,2325 4855,2325 v4(4830,2350) 4855,2375 pad.11@4917.64,2375 ; pad.12@4917.83,3425 4855,3425 4830,3450 4855,3475 pad.11@4917.83,3475 ; pad.12@4920,5580 4850,5580 v4(4830,5600) 4860,5630 pad.11@4920,5630 ; pad.12@4920.16,6685 4845,6685 4830,6700 ; pad.11@4920.16,6735 4865,6735 4830,6700 ; pad.21@5177.48,2150 5260,2067.48 5260,1760 5269.52,1750.48 ; v3(5181,4840) 5272.36,4931.36 5272.36,4942 ; 5269.52,1678 5269.52,1750.48 ; 5270.52,2788 5270.2,2788.32 5270.2,2850 ; 5272.52,6043 5325.52,5990 v3(5340,5990) ; v4@5374,2607 5374,2581 5435,2520 ; pad.1@5437.32,1925 5437.32,1797.32 5390,1750 5270,1750 5269.52,1750.48 ; pad.9@5437.32,2325 pad.10@5437.32,2375 5437.32,2517.68 5435,2520 ; v3(5437.52,3025) 5437.52,3017.32 5270.2,2850 ; pad.9@5437.52,3425 5505,3425 v4(5530,3450) ; pad.10@5437.52,3475 5505,3475 v4(5530,3450) ; pad.9@5439.69,5580 5510,5580 5530,5600 ; pad.10@5439.69,5630 5500,5630 5530,5600 ; pad.1@5439.84,6285 5455,6285 v2(5490,6250) ; pad.9@5439.84,6685 5515,6685 v4(5530,6700) 5495,6735 pad.10@5439.84,6735 ; 5818.58,5170 5818.58,5475.2 5828.39,5485 5831.4,5488.01 5831.4,5641.88 5818.22,5655.06 5766.11,5655.06 5716.05,5605 5707.52,5605 5625,5605 v4(5590,5640) 5550,5600 5530,5600 ; 5826.02,2230 5829.04,2233.01 5829.04,2379.81 5808.78,2400.06 5763.75,2400.06 5713.69,2350 5705.16,2350 5690,2350 5520,2520 5435,2520 ; 5826.22,3330 5829.23,3333.01 5829.23,3486.88 5816.05,3500.06 5763.95,3500.06 5713.89,3450 5705.35,3450 v4(5530,3450) ; 5874.84,3010 5874.84,3005.95 5718.89,2850 5270.2,2850 ; 1345.98,3294.02 1480,3428.03 v4(1480,3450) ; 1345.98,3294.02 1360,3280 1360,3190
  Top Layer w100: 1820,1248 v3(1820,1302) v3(1820,1352) v3(1820,1402) v3(1820,1452) ; 2013,1273 v3(2013,1352) v3(2013,1402) v3(2013,1452) v3(2013,1502) ; 2211,1246 v3(2211,1308) v3(2211,1358) v3(2211,1408) v3(2211,1458) v3(2211,1508) ; 2408,1243 v3(2408,1306) v3(2408,1356) v3(2408,1406) v3(2408,1456) v3(2408,1506) ; 2597,1206 v3(2597,1315) v3(2597,1365) v3(2597,1415) v3(2597,1465) v3(2597,1515) ; v3(2796,1524) v3(2796,1474) v3(2796,1424) v3(2796,1374) v3(2796,1324) ; v3(2796,1324) 2848,1272 2848,1206 2796,1258 v3(2796,1324)
  Bottom Layer w10: 1450,3840 1502.32,3840 R24.2@1510,3847.68 ; v2(1490,4880) R36.2@1540,4880 ; v2(1580,2750) 1622.32,2750 R12.2@1630,2757.68 ; v3(1929,6108) 1949.68,6108 R48.2@2010,6047.68 ; U1.13@1959.13,4285 2025,4285 v2(2030,4280) ; v2(3160,3900) 3190,3870 3215.35,3870 R28.2@3220,3865.35 ; v3(3218.58,2850) 3298.58,2770 3332.32,2770 R16.2@3340,2777.68 ; R52.2@3760,5884.65 3765.35,5890 3800,5890 3802.56,5887.44 3802.56,5647.44 v4(3850,5600) ; R40.2@3800,4842.32 3802.32,4840 v2(3840,4840) ; U7.13@4680,4240 4703.19,4263.19 4724.57,4263.19 4746.38,4285 v3(4750.87,4285) ; v2(4830,2700) 4872.32,2700 R20.2@4880,2707.68 ; v2(4850,4880) 4897.68,4880 R44.2@4900,4877.68 ; v2(4860,3870) 4902.32,3870 R32.2@4910,3877.68 ; U8.13@5319.13,4265 5385,4265 v2(5390,4260) ; R56.2@5470,5932.32 5472.32,5930 v2(5520,5930)
  other v1: 3395,1940 3465,1940 3535,1940 3605,1940 1714,1942 1784,1942 1854,1942 1924,1942 5071,1942 5141,1942 5211,1942 5281,1942 3395,2010 3465,2010 3535,2010 3605,2010 1714,2012 1784,2012 1854,2012 1924,2012 5071,2012 5141,2012 5211,2012 5281,2012 3395,2080 3465,2080 3535,2080 3605,2080 1714,2082 1784,2082 1854,2082 1924,2082 5071,2082 5141,2082 5211,2082 5281,2082 3395,2150 3465,2150 3535,2150 3605,2150 1714,2152 1784,2152 1854,2152 1924,2152 5071,2152 5141,2152 5211,2152 5281,2152 3395,2220 3465,2220 3535,2220 3605,2220 1714,2222 1784,2222 1854,2222 1924,2222 5071,2222 5141,2222 5211,2222 5281,2222 3395,2290 3465,2290 3535,2290 3605,2290 1714,2292 1784,2292 1854,2292 1924,2292 5071,2292 5141,2292 5211,2292 5281,2292 3395,2360 3465,2360 3535,2360 3605,2360 1714,2362 1784,2362 1854,2362 1924,2362 5071,2362 5141,2362 5211,2362 5281,2362 1724,3040 1794,3040 1864,3040 1934,3040 5072,3040 5142,3040 5212,3040 5282,3040 3397,3041 3467,3041 3537,3041 3607,3041 1724,3110 1794,3110 1864,3110 1934,3110 5072,3110 5142,3110 5212,3110 5282,3110 3397,3111 3467,3111 3537,3111 3607,3111 1724,3180 1794,3180 1864,3180 1934,3180 5072,3180 5142,3180 5212,3180 5282,3180 3397,3181 3467,3181 3537,3181 3607,3181 1724,3250 1794,3250 1864,3250 1934,3250 5072,3250 5142,3250 5212,3250 5282,3250 3397,3251 3467,3251 3537,3251 3607,3251 1724,3320 1794,3320 1864,3320 1934,3320 5072,3320 5142,3320 5212,3320 5282,3320 3397,3321 3467,3321 3537,3321 3607,3321 1724,3390 1794,3390 1864,3390 1934,3390 5072,3390 5142,3390 5212,3390 5282,3390 3397,3391 3467,3391 3537,3391 3607,3391 1724,3460 1794,3460 1864,3460 1934,3460 5072,3460 5142,3460 5212,3460 5282,3460 3397,3461 3467,3461 3537,3461 3607,3461 1712,5191 1782,5191 1852,5191 1922,5191 3394,5191 3464,5191 3534,5191 3604,5191 5073,5197 5143,5197 5213,5197 5283,5197 1712,5261 1782,5261 1852,5261 1922,5261 3394,5261 3464,5261 3534,5261 3604,5261 5073,5267 5143,5267 5213,5267 5283,5267 1712,5331 1782,5331 1852,5331 1922,5331 3394,5331 3464,5331 3534,5331 3604,5331 5073,5337 5143,5337 5213,5337 5283,5337 1712,5401 1782,5401 1852,5401 1922,5401 3394,5401 3464,5401 3534,5401 3604,5401 5073,5407 5143,5407 5213,5407 5283,5407 1712,5471 1782,5471 1852,5471 1922,5471 3394,5471 3464,5471 3534,5471 3604,5471 5073,5477 5143,5477 5213,5477 5283,5477 1712,5541 1782,5541 1852,5541 1922,5541 3394,5541 3464,5541 3534,5541 3604,5541 5073,5547 5143,5547 5213,5547 5283,5547 1712,5611 1782,5611 1852,5611 1922,5611 3394,5611 3464,5611 3534,5611 3604,5611 5073,5617 5143,5617 5213,5617 5283,5617 5076,6300 5146,6300 5216,6300 5286,6300 3394,6302 3464,6302 3534,6302 3604,6302 5076,6370 5146,6370 5216,6370 5286,6370 3394,6372 3464,6372 3534,6372 3604,6372 5076,6440 5146,6440 5216,6440 5286,6440 3394,6442 3464,6442 3534,6442 3604,6442 5076,6510 5146,6510 5216,6510 5286,6510 3394,6512 3464,6512 3534,6512 3604,6512 5076,6580 5146,6580 5216,6580 5286,6580 3394,6582 3464,6582 3534,6582 3604,6582 5076,6650 5146,6650 5216,6650 5286,6650 3394,6652 3464,6652 3534,6652 3604,6652 5076,6720 5146,6720 5216,6720 5286,6720 3394,6722 3464,6722 3534,6722 3604,6722
  other v2: 1450,3830 4410,4150 4419,4316 3075,4790
  other v3: 4721.14,2850 4199.49,3010 4150.87,3330 4030,3450 4750.87,4735 4723.31,5005 2514.88,5160 5439.69,5180 2466.26,5480 5015.17,5856 3043.46,6110 4723.46,6110 1528.58,6120 2514.84,6270 4197.17,6270 2077.52,6285 5830,6580 2466.22,6590 4148.54,6590 4030,6690 2345.35,6710 5707.68,6710
  other v4: 4850,3450
KILL: pad.18 R1.2 W2.2 | length 21314.5
  Top Layer w10: v2(1439.6,6270.4) 1501.5,6332.29 1501.5,6354.01 1532.49,6385 pad.18@1557.83,6385 ; v2(1441.42,6210) 1441.42,5978.58 1492,5928 ; v2(1450,2690) 1260,2690 1180,2610 1180,2008.28 1288.28,1900 1409.18,1900 1511.98,2002.8 1537.32,2002.8 pad.18@1559.53,2025 ; pad.18@1557.87,5275 1552.76,5269.88 1413,5269.88 1388.94,5293.94 1388.94,5824.94 1492,5928 ; pad.18@1567.83,3125 1545.63,3102.8 1520.28,3102.8 1490,3072.51 1490,2968.56 1471.72,2950.28 v2(1450,2950.28) 1348.01,2950.28 1210,3088.28 1210,3440 1527.17,3757.17 1680.36,3757.17 1723.18,3800 2375,3800 2386,3811 v2(2400,3811) ; v2(2070,5815) 1840,5815 1662,5993 1557,5993 1492,5928 ; v2(2599,3814) 3053,3814 v2(3056,3811) ; v2(3100,2720) 2880,2500 2880,1880 2930,1830 3019.81,1830 3192.61,2002.8 3217.95,2002.8 pad.18@3240.16,2025 ; v2(3150,6290) 3150,6320.19 3192.61,6362.8 3217.95,6362.8 pad.18@3240.16,6385 ; pad.18@3237.64,5275 3215.43,5252.8 3190.09,5252.8 v2(3161.3,5224.01) 3161.3,5140.29 3241.31,5060.28 3269.6,5060.28 3278.39,5051.49 3278.39,4966.61 3353,4892 3516.28,4892 3708.28,4700 v2(3800,4700) ; pad.18@3242.48,3125 3213.46,3125 3094.46,3006 v2(3093,3006) 3070,3029 v2(3070,3730) 3345,3730 3445,3830 v2(3550,3830) v2@3556.54,3830 ; v2(3710,4095.3) 3710,4346 3732.5,4368.5 3732.5,4442.5 3816.38,4526.38 3841.1,4526.38 3920,4605.28 v2(3920,4700) ; v2(3850,3760) 4560,3760 4600,3720 4600,3079.87 4626.5,3053.38 4626.5,2876.5 ; R1.2@4220,4307.91 4160,4367.91 4160,4630 W2.2@4110,4680 4244.64,4680 4301.21,4736.57 4376.57,4736.57 v2(4580,4940) ; v2(4720,2970) 4626.5,2876.5 ; v2(4770,5160) 4802.44,5192.44 4807.09,5192.44 4894.65,5280 pad.18@4920,5280 ; v2(4790,3010) 4861.5,3081.5 4861.5,3094.01 4892.49,3125 pad.18@4917.83,3125 ; v2(4860,5720) 4860,6038.87 4840.35,6058.51 4840.35,6330.54 4872.61,6362.8 4897.95,6362.8 pad.18@4920.16,6385 ; pad.18@4917.64,2025 4888.61,2025 4801.06,1937.44 4670.52,1937.44 4626.5,1981.46 4626.5,2876.5
  Bottom Layer w10: v2(1439.6,6270.4) 1441.42,6268.58 v2(1441.42,6210) ; v2(1450,2690) v2(1450,2950.28) ; v2@2065,5815 v2(2070,5815) 2275,5815 2750,6290 v2(3150,6290) 3210,6230 3210,5433.43 3161.3,5384.73 v2(3161.3,5224.01) ; v2(2400,3811) 2403,3814 v2(2599,3814) ; v2(3056,3811) 3070,3797 v2(3070,3730) ; v2(3093,3006) 3100,2999 v2(3100,2720) ; v2(3550,3830) 3780,3830 ; v2(3710,4095.3) 3804.7,4095.3 3840,4060 3840,3880 3790,3830 3780,3830 ; v2(3800,4700) v2(3920,4700) 4090,4700 W2.2@4110,4680 ; v2(3850,3760) 3780,3830 ; v2(4580,4940) 4580,4970 v2(4770,5160) 4770,5484.64 4805,5519.64 4805,5550 4760,5595 4760,5620 v2(4860,5720) ; v2(4720,2970) 4750,2970 v2(4790,3010)
"MANUAL KILL": 
MISO: JTAG1.1 U5.22 | length 480.4
  Top Layer w10: U5.22@3298.98,4102.4 3357.6,4102.4 v2(3360,4100)
  Bottom Layer w10: JTAG1.1@2990,3983.08 3099.08,3983.08 3216,4100 v2(3360,4100)
MOSI: JTAG1.4 U5.21 | length 462
  Top Layer w10: v2(3240,4120) 3242.09,4122.09 U5.21@3298.98,4122.09
  Bottom Layer w10: JTAG1.4@2890,4083.08 2927.03,4083.08 2971.56,4038.55 3131.45,4038.55 3212.9,4120 v2(3240,4120)
"MOTOR+_Motor 0": *.66 *.67 C7_0.2 C13_0.2 D1.2 pad.6@2079.21,2175 pad.7@2079.21,2225 | length 2119.5
  Top Layer w10: C13_0.2@2431.69,2329.61 C13_0.2@2431.69,2350
  Top Layer w25: pad.6@2079.21,2175 2125,2175 v4(2150,2200) ; pad.7@2079.21,2225 2125,2225 v4(2150,2200) ; D1.2@2339.37,1910 C7_0.2@2339.37,2222.72 ; C13_0.2@2431.69,2329.61 C7_0.2@2332.09,2230 C7_0.2@2339.37,2222.72 ; v4(2150,2200) 2316.65,2200 C7_0.2@2339.37,2222.72
  Bottom Layer w50: v4(2150,2200) 2150,2124 2155.29,2124 2419.29,1860 2460,1860 2701,1619 2701,1181
"MOTOR+_Motor 1": "C7_Motor 1.2" "C13_Motor 1.2" "D1_Motor 1.2" *.76 *.77 pad.6@3759.84,2175 pad.7@3759.84,2225 | length 2012.8
  Top Layer w25: pad.6@3759.84,2175 3805,2175 v4(3830,2200) ; pad.7@3759.84,2225 3805,2225 v4(3830,2200) ; 4020,1910 4012.72,1917.28 4012.72,2230 ; 4112.32,2350 4112.32,2329.61 4012.72,2230 ; v4(3830,2200) 3982.72,2200 4012.72,2230
  Bottom Layer w50: 3679,1132 3679,1415 3877,1613 3877,2153 v4(3830,2200) v4@3828,2198
"MOTOR+_Motor 2": "C7_Motor 2.2" "C13_Motor 2.2" "D1_Motor 2.2" *.86 *.87 pad.6@5437.32,2175 pad.7@5437.32,2225 | length 2445.5
  Top Layer w25: pad.6@5437.32,2175 5475,2175 5495,2195 v4(5522,2195) ; pad.7@5437.32,2225 5475,2225 5500,2200 5660.2,2200 ; 5697.48,1910 5660.2,1947.28 5660.2,2200 ; 5789.8,2350 5789.8,2329.61 5690.2,2230 5660.2,2200
  Bottom Layer w50: *.87@4710,1160 4710,1330 5050,1670 5447,1670 5525,1748 v4@5525,2200
"MOTOR+_Motor 3": "C7_Motor 3.2" "C13_Motor 3.2" "D1_Motor 3.2" *.68 *.69 pad.6@2087.52,3275 pad.7@2087.52,3325 | length 3378.9
  Top Layer w25: pad.6@2087.52,3275 2125,3275 v4(2150,3300) 2125,3325 pad.7@2087.52,3325 ; 2340.39,3330 v2(2410,3330) 2435.02,3355.02 2435.02,3445.02 2440,3450 ; 2347.68,3010 2347.68,3087.68 v2(2350,3090)
  Bottom Layer w25: v4(2150,3300) 2380,3300 ; v2(2350,3090) 2380,3120 2380,3300 ; v2(2410,3330) 2380,3300
  Bottom Layer w50: v4(2150,3300) 2150,2284.85 2210,2224.85 2210.15,2224.85 2899,1536 2899,1155
"MOTOR+_Motor 4": "C7_Motor 4.2" "C13_Motor 4.2" "D1_Motor 4.2" *.78 *.79 pad.6@3762.17,3275 pad.7@3762.17,3325 | length 3092.4
  Top Layer w25: pad.6@3762.17,3275 3805,3275 v4(3830,3300) ; pad.7@3762.17,3325 3805,3325 v4(3830,3300) ; 4022.32,3010 4022.32,3322.72 4015.04,3330 ; 4114.65,3450 4015.04,3350.39 4015.04,3330 ; v4(3830,3300) 3985.04,3300 4015.04,3330
  Bottom Layer w50: v4(3830,3300) 4073,3057 4073,1605 3876,1408 3876,1228
"MOTOR+_Motor 5": "C7_Motor 5.2" "C13_Motor 5.2" "D1_Motor 5.2" *.84 *.85 pad.6@5437.52,3275 pad.7@5437.52,3325 | length 3547.2
  Top Layer w25: pad.6@5437.52,3275 5485,3275 v4(5510,3300) ; pad.7@5437.52,3325 5485,3325 v4(5510,3300) ; 5697.68,3010 5697.68,3262.72 5660.39,3300 ; 5790,3450 5690.39,3350.39 5690.39,3330 5660.39,3300 ; v4(5510,3300) 5660.39,3300
  Bottom Layer w50: 4470,1290 4540,1360 4650,1360 5027,1737 5397,1737 5452.5,1792.5 5452.5,2237.35 5510,2294.85 v4(5510,3300)
"MOTOR+_Motor 6": "C7_Motor 6.2" "C13_Motor 6.2" "D1_Motor 6.2" *.58 *.59 pad.6@2077.56,5425 pad.7@2077.56,5475 | length 6589.5
  Top Layer w25: pad.6@2077.56,5425 2115,5425 v4(2140,5450) ; pad.7@2077.56,5475 2115,5475 v4(2140,5450) ; 2337.72,5160 2330.43,5167.28 2330.43,5480 ; 2430.04,5600 2330.43,5500.39 2330.43,5480 ; v4(2140,5450) 2300.43,5450 2330.43,5480
  Bottom Layer w50: 1720.32,5686.22 1641.37,5686.22 1330.15,5375 1330.15,1685 1460.15,1555 1844,1555 1917,1482 1917,1142 ; 1726.14,5686.22 1909.29,5686.22 ; 1915.12,5686.22 1956.54,5686.22 1985.83,5656.93 1985.83,5604.17 v4(2140,5450)
"MOTOR+_Motor 7": "C7_Motor 7.2" "C13_Motor 7.2" "D1_Motor 7.2" *.92 *.93 pad.6@3757.32,5425 pad.7@3757.32,5475 | length 7597.5
  Top Layer w25: pad.6@3757.32,5425 3795,5425 v4(3820,5450) ; pad.7@3757.32,5475 3795,5475 v4(3820,5450) ; 4017.48,5160 4017.48,5472.72 4010.2,5480 ; 4109.8,5600 4010.2,5500.39 4010.2,5480 ; v4(3820,5450) 3980.2,5450 4010.2,5480
  Bottom Layer w50: v4(3820,5450) 4050,5450 4360,5760 5377,5760 5742.5,5394.5 5742.5,1595.5 5577,1430 5330,1430 5250,1350 5250,1181
"MOTOR+_Motor 8": "C7_Motor 8.2" "C13_Motor 8.2" "D1_Motor 8.2" *.88 *.89 pad.6@5439.69,5430 pad.7@5439.69,5480 | length 5762.6
  Top Layer w25: pad.6@5439.69,5430 5490,5430 v4(5510,5450) ; pad.7@5439.69,5480 5480,5480 v4(5510,5450) ; 5641.42,5170 5641.42,5433.86 5657.56,5450 ; 5792.17,5605 5792.17,5584.61 5692.56,5485 5657.56,5450 ; v4(5510,5450) 5657.56,5450
  Bottom Layer w50: *.88@4808,1160 4860,1212 ; *.89@4906,1160 4860,1206 4860,1212 ; v4(5510,5450) 5597.5,5362.5 5597.5,1701.5 5496,1600 5100,1600 4860,1360 4860,1212
"MOTOR+_Motor 9": "C7_Motor 9.2" "C13_Motor 9.2" "D1_Motor 9.2" *.52 *.53 pad.6@2077.52,6535 pad.7@2077.52,6585 | length 7771.6
  Top Layer w25: pad.6@2077.52,6535 2115,6535 v4(2140,6560) ; pad.7@2077.52,6585 2115,6585 v4(2140,6560) ; 2337.68,6270 2330.39,6277.28 2330.39,6590 ; 2430,6710 2330.39,6610.39 2330.39,6590 ; v4(2140,6560) 2300.39,6560 2330.39,6590
  Bottom Layer w50: 1330,1173 1330,1423.15 1120,1633.15 1120,6645.15 1334.85,6860 2090,6860 2140,6810 v4(2140,6560)
"MOTOR+_Motor 10": "C7_Motor 10.2" "C13_Motor 10.2" "D1_Motor 10.2" *.98 *.99 pad.6@3759.84,6535 pad.7@3759.84,6585 | length 8827.8
  Top Layer w25: pad.6@3759.84,6535 3805,6535 v4(3830,6560) ; pad.7@3759.84,6585 3805,6585 v4(3830,6560) ; 4020,6270 4012.72,6277.28 4012.72,6590 ; 4112.32,6710 4012.72,6610.39 4012.72,6590 ; v4(3830,6560) 3982.72,6560 4012.72,6590
  Bottom Layer w50: v4(3830,6560) 4190,6920 5750,6920 5960,6710 5960,1440 5788,1268 *.98@5788,1160
"MOTOR+_Motor 11": "C7_Motor 11.2" "C13_Motor 11.2" "D1_Motor 11.2" *.94 *.95 pad.6@5439.84,6535 pad.7@5439.84,6585 | length 6767
  Top Layer w25: pad.6@5439.84,6535 5485,6535 v4(5510,6560) ; pad.7@5439.84,6585 5485,6585 v4(5510,6560) ; 5700,6270 5692.72,6277.28 5692.72,6590 ; 5792.32,6710 5692.72,6610.39 5692.72,6590 ; v4(5510,6560) 5662.72,6560 5692.72,6590
  Bottom Layer w50: 5450,1167 5450,1360 5627,1360 5815,1548 5815,6510 5770,6555 5770,6560 v4(5510,6560)
"MOTOR-_Motor 0": *.62 *.63 C11_0.2 C14_0.2 D2.2 pad.14@1559.53,2225 pad.15@1559.53,2175 | length 2130.6
  Top Layer w25: C11_0.2@1437.91,2090 1437.91,2184.41 C14_0.2@1422.32,2200 v4(1480,2200) ; pad.15@1559.53,2175 1505,2175 v4(1480,2200) ; pad.14@1559.53,2225 1505,2225 v4(1480,2200)
  Bottom Layer w50: v4@1470,1750 v4@1470,2200 ; v4(1480,1750) 1570.29,1750 1641.29,1679 2178,1679 2309,1548 2309,1134